# Altium PCB TinyDVR_Master.PcbDoc
Units mil, origin at the board's own origin, x right, y up, seen from the top; angles counter-clockwise.
Board outline 2156 x 1540 mil, 2 copper layers (Top Layer, Bottom Layer); 28 components, 17 nets, 136 pads, 318 vias.
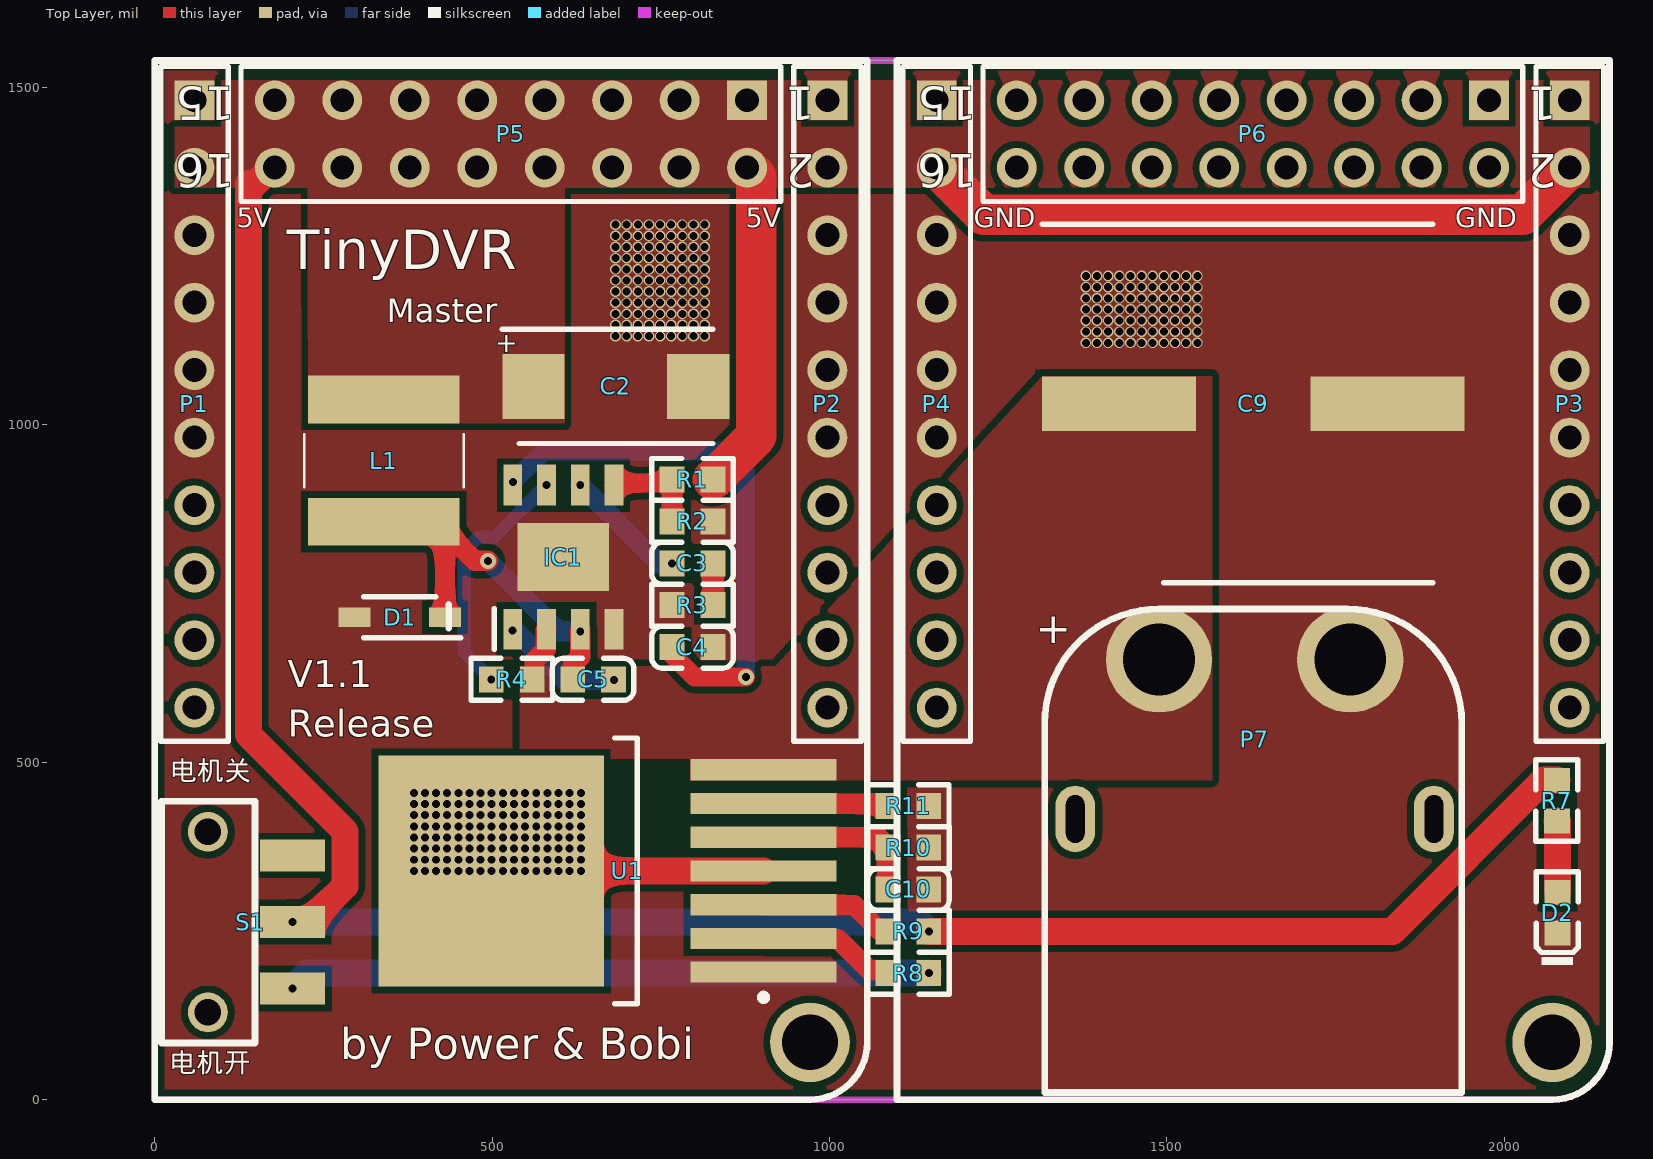
[diagram p0: Top Layer view]
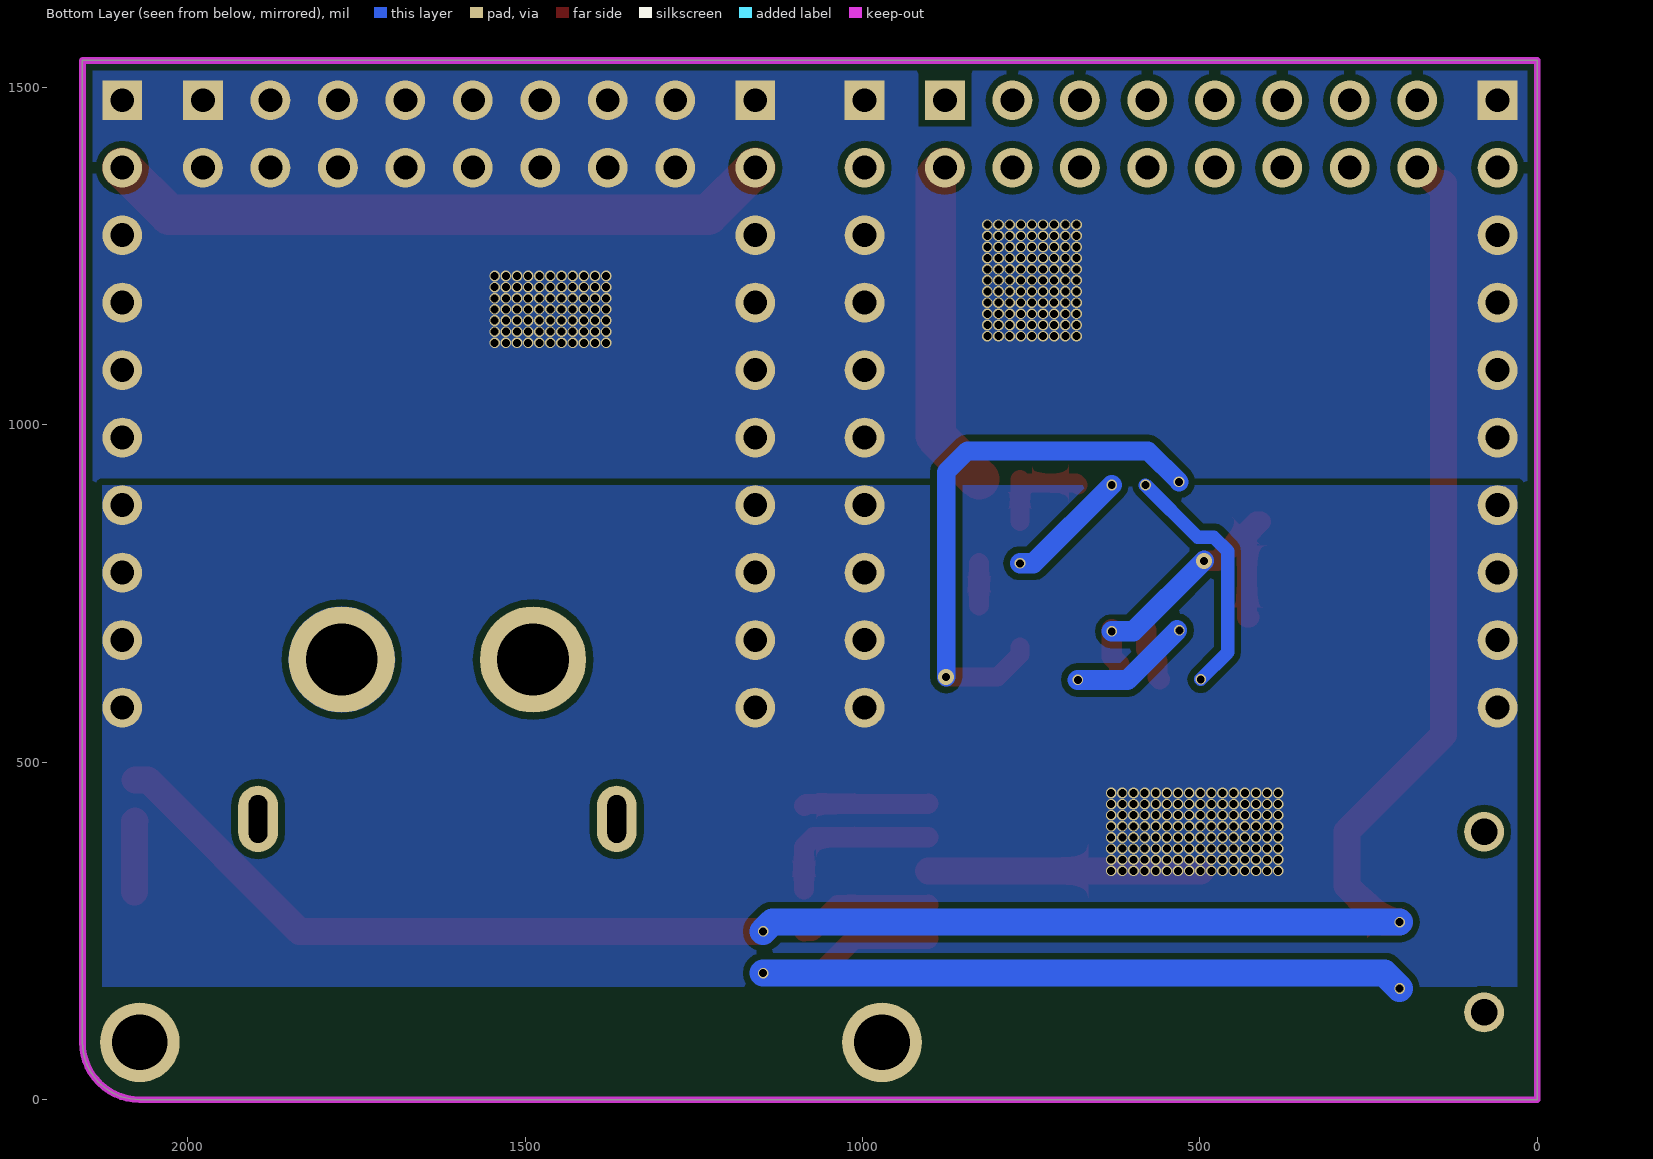
[diagram p1: Bottom Layer view, seen from below]
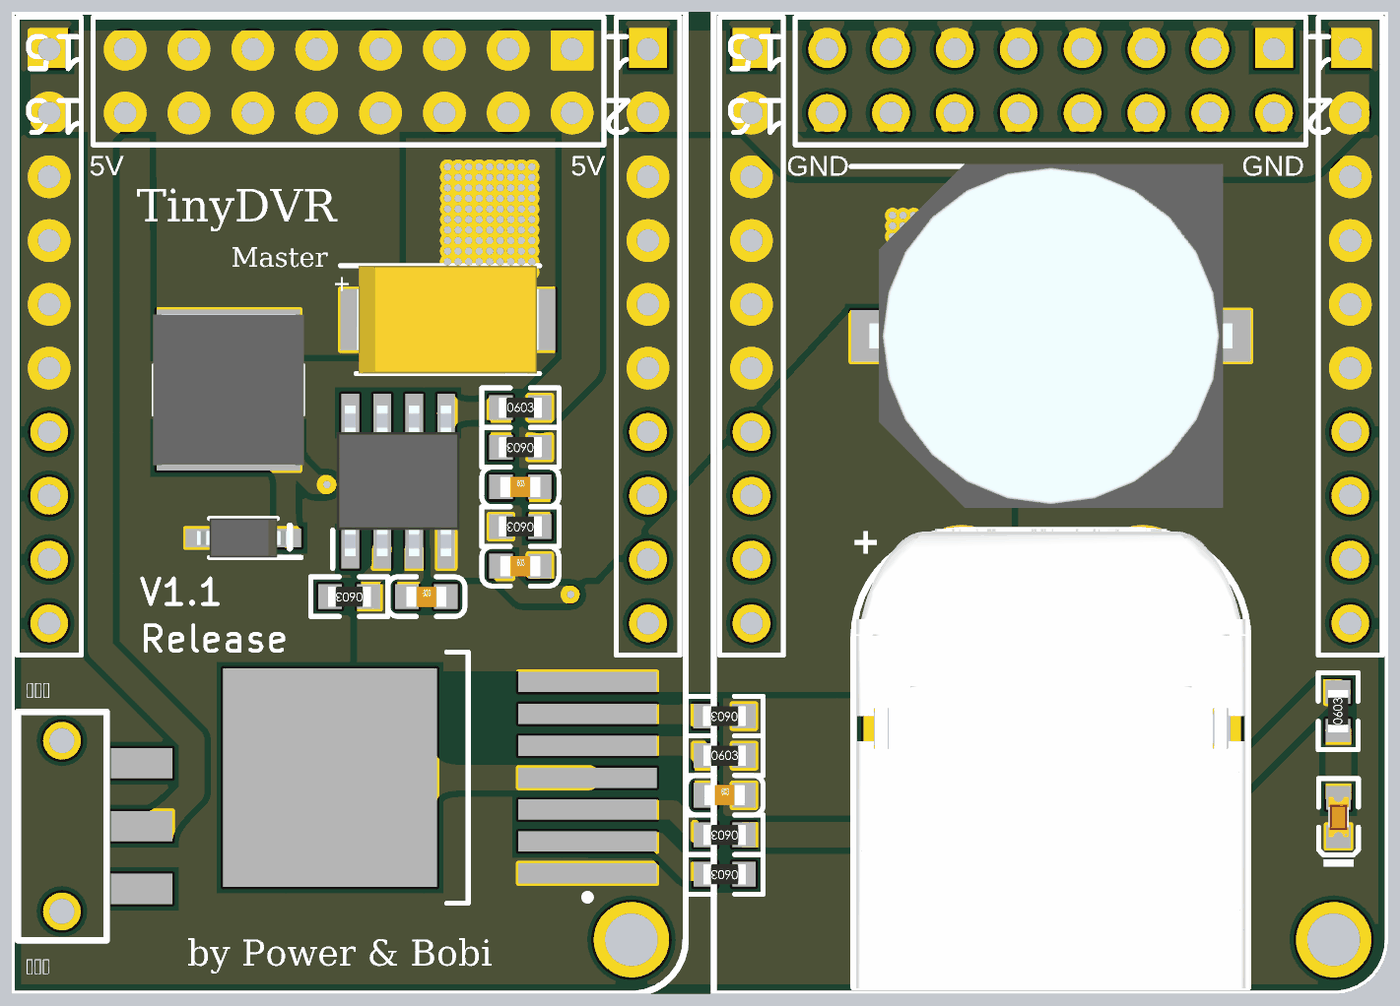
[diagram p2: 3D render of the assembled board from above, using the file's embedded part models]

## Layer stack, top to bottom
Top Solder: solder mask 0.4, Solder Resist, Dk 3.5
Top Layer: signal copper 1.4
Dielectric 1: dielectric 12.6, FR-4, Dk 4.8
Bottom Layer: signal copper 1.4
Bottom Solder: solder mask 0.4, Solder Resist, Dk 3.5

## Board outline
0,0 0,1540 2156,1540 2156,85 cw(c2071,85) 2071,0

## Design rules (kind name [scope] priority, off if disabled: settings)
Clearance [All] p1: gap=10 ignorepadtopadclearanceinfootprint=FALSE except(0: Arc-Hole Track-Hole SMDPad-Hole THPad-Hole Via-Hole Fill-Hole Poly-Hole Region-Hole Text-Hole)
PlaneConnect [All] p1: planeconnectstyle=Direct reliefexpansion=20 reliefentries=4 reliefconductorwidth=10 reliefairgap=10
PolygonConnect [All] p1: connectstyle=Direct reliefconductorwidth=10 reliefentries=4 polygonreliefangle="90 Angle" airgapwidth=10
RoutingVias [All] p1: holewidth=11.81 width=23.62 viastyle="Through Hole" minholewidth=11.81 minwidth=23.62 maxholewidth=11.81 maxwidth=23.62
SolderMaskExpansion [All] p1: expansion=4
Width [All] p1: maxlimit=100 minlimit=10 preferedwidth=10
29 further rules are at their usual default settings.

## Components (designator, comment, footprint, x,y, rotation, side; value= is the part's Value field where it differs from the comment)
C2 "10uF 4.5V tan" CAPPM7343X310N 683.5,1057 r0 top
C3 "6.8nF (682) 10% 50V" 0603_C 797,794.82 r0 top
C4 "100nF (104) 10% 50V" 0603_C 797,670.5 r0 top
C5 "10nF (103) 10% 50V" 0603_C 649.76,622.81 r0 top
C9 "1000uf 25v" CAPAE1350X1400N 1628,1031.5 r0 top
C10 "100nF (104) 10% 50V" 0603_C 1117,311.5 r0 top
D1 "B130LAW-7-F" SOD3716X145N 363.2,714.81 r180 top
D2 "红灯 0603" 0603_LED_S1 2078.5,277.18 r90 top
IC1 "MP1484EN-LF" SOIC127P600X170-9N 605.7,804.04 r90 top
L1 "1040 10UH 5A" 74404064470 339.79,946.84 r270 top
P1 "Header 10" HDR1X10 59,1481 r270 top
P2 "Header 10" HDR1X10 997,1481 r270 top
P3 "Header 10" HDR1X10 2097,1481 r270 top
P4 "Header 10" HDR1X10 1159,1481 r270 top
P5 "Header 8X2" HDR2X8 878,1481 r180 top
P6 "Header 8X2" HDR2X8 1977.5,1481 r180 top
P7 "XT60PW-M" XT60PW-M 1771.7,652.22 r180 top
R1 "44.2K" 0603_R 797,919 r0 top
R2 "10KΩ (1002) ±1%" 0603_R 797,857 r180 top
R3 "6.8KΩ (6801) ±1%" 0603_R 797,732.68 r180 top
R4 "100KΩ (1003) ±1%" 0603_R 529.13,622.81 r180 top
R7 "4.7k" 0603_R 2077.9,443.18 r90 top
R8 "10KΩ (1002) ±1%" 0603_R 1117,187.5 r180 top
R9 "10KΩ (1002) ±1%" 0603_R 1117,249.5 r180 top
R10 "1KΩ (1001) ±1%" 0603_R 1117,373.5 r0 top
R11 "2KΩ (2001) ±1%" 0603_R 1116.69,435.5 r180 top
S1 "SW-SPDT" SW_9*3.5*5.5MM 204,263.14 r90 top
U1 "BTN7971" DPAK127P1615X127-8N 672,339 r180 top

## Footprints (in the part's own frame and the unit in brackets; to place one, negate y for a bottom-side part, rotate by r counter-clockwise, add the part's x,y. Pads: shape width x height; smd on the part's side, far side on the other; paste and mask are expansions set on the pad)
0603_C [mm]
  rect 0.93x0.98 smd: 1(-0.77,0) 2(0.77,0)
  silkscreen extent -1.53,-0.79 1.54,0.79, body extent -0.8,-0.4 0.8,0.4, height 0.3
0603_LED_S1 [mm]
  rect 0.93x0.98 smd: A(0.77,0) K(-0.77,0)
  silkscreen extent -1.98,-0.79 1.54,0.79, body extent -0.8,-0.4 0.8,0.4, height 0.6
0603_R [mm]
  rect 0.93x0.98 smd: 1(-0.77,0) 2(0.77,0)
  silkscreen extent -1.53,-0.79 1.54,0.79, body extent -0.85,-0.4 0.85,0.4, height 0.56
74404064470 [mm]
  rect 1.8x5.7 smd: 1(-2.3,0) 2(2.3,0)
  silkscreen extent -1,-3 1,3, body extent -3.02,-3 3.02,3, height 4.1
CAPAE1350X1400N [mm]
  rect 5.8x2.05 smd: 1(-5.05,0) 2(5.05,0)
  silkscreen extent -7.95,-6.75 6.75,6.75, body extent -7.22,-6.85 7.22,6.85, height 14
CAPPM7343X310N [mm]
  rect 2.35x2.45 smd: 1(-3.1,0) 2(3.1,0)
  silkscreen extent -4.28,-2.15 3.65,2.15, body extent -3.65,-2.15 3.65,2.15, height 3.1
DPAK127P1615X127-8N [mm] "TO, 8-Pads, Body 7.23x8.36mm (max), IPC Medium Density"
  rect 5.5x0.8 smd: 1(-5.85,3.81) 2(-5.85,2.54) 3(-5.85,1.27) 4(-5.85,0) 5(-5.85,-1.27) 6(-5.85,-2.54) 7(-5.85,-3.81)
  rect 8.5x8.7 smd: 8(4.4,0)
  silkscreen extent -5.97,-5 -0.25,5, body extent -1.1,-5 7.15,5, height 1.27
HDR1X10 [mm] "Connector; Header; 10 Position"
  rect 1.5x1.5 hole 0.9: 1(0,0)
  round 1.5 hole 0.9: 2(2.54,0) 3(5.08,0) 4(7.62,0) 5(10.16,0) 6(12.7,0) 7(15.24,0) 8(17.78,0) 9(20.32,0) 10(22.86,0)
  silkscreen extent -1.27,-1.27 24.13,1.27
HDR2X8 [mm] "Connector; Header; 8x2 Position"
  rect 1.5x1.5 hole 0.9: 1(0,0)
  round 1.5 hole 0.9: 2(0,2.54) 3(2.54,0) 4(2.54,2.54) 5(5.08,0) 6(5.08,2.54) 7(7.62,0) 8(7.62,2.54) 9(10.16,0) 10(10.16,2.54) 11(12.7,0) 12(12.7,2.54) 13(15.24,0) 14(15.24,2.54) 15(17.78,0) 16(17.78,2.54)
  silkscreen extent -1.27,-1.27 19.05,3.81
SOD3716X145N [mm]
  rect 1.2x0.75 smd: 1(-1.7,0) 2(1.7,0)
  silkscreen extent -2.3,-0.77 1.35,0.77, body extent -1.85,-0.77 1.85,0.77, height 1.45
SOIC127P600X170-9N [mm]
  rect 1.525x0.7 smd: 1(-2.712,1.905) 2(-2.712,0.635) 3(-2.712,-0.635) 4(-2.712,-1.905) 5(2.712,-1.905) 6(2.712,-0.635) 7(2.712,0.635) 8(2.712,1.905)
  rect 2.56x3.45 smd: 9(0,0)
  silkscreen extent -3.47,2.61 -1.95,2.61, body extent -3,-2.45 3,2.45, height 1.7
SW_9*3.5*5.5MM [mm]
  rect 1.2x2.45 smd: 1(-2.5,0) 2(0,0) 3(2.5,0)
  round 1.5 hole 1: 4(-3.4,3.175) 4(3.4,3.175)
  Top Layer pour cut-out: -1.5,7.9
  silkscreen extent -4.55,1.4 4.55,4.93
XT60PW-M [mm]
  oval 1.5x2.5 hole 0.7 slot 1.8 at 90 deg: 0(-3.15,6) 0(10.35,6)
  round 4 hole 2.7: 1(7.2,0) 2(0,0)
  silkscreen extent -4.2,-1.9 11.5,16.3, body extent -4.3,-1.95 11.6,16.35, height 8.45

## Part data
C2: library part T494D106K035AH, "T494D106K035AH", Manufacturer_Name=Kemet, Mouser Part Number=80-T494D106K035AH, Datasheet Link=http://www.mouser.com/ds/2/212/kemet_kem_t2008_t494-544880.pdf, Height=3.1mm, Manufacturer_Part_Number=T494D106K035AH, Mouser Price/Stock=https://www.mouser.com/Search/Refine.aspx?Keyword=80-T494D106K035AH
C3: library part "0603 6.8nF (682) 10% 50V", "贴片电容", Package=0603, SuppliersPartNumber=C1631, ComponentLink1Description=供?, ComponentLink1URL=http://www.szlcsc.com/product/details_1983.html, Supplier=LC
C4 C10: library part "0603 100nF (104) 10% 50V", "贴片电容", Package=0603, SuppliersPartNumber=C14663, ComponentLink1Description=供?, ComponentLink1URL=http://www.szlcsc.com/product/details_15331.html, Supplier=LC
C5: library part "0603 10nF (103) 10% 50V", "贴片电容", Package=0603, SuppliersPartNumber=C57112, ComponentLink1Description=供?, ComponentLink1URL=http://www.szlcsc.com/product/details_58143.html, Supplier=LC
C9: library part 865060462010, "Capacitor Polarised", Manufacturer_Name="Wurth Elektronik", Mouser Part Number=710-865060462010, RS Part Number=8395599, Datasheet Link=https://katalog.we-online.de/pbs/datasheet/865060462010.pdf, Height=14mm, Manufacturer_Part_Number=865060462010, Mouser Price/Stock=https://www.mouser.com/Search/Refine.aspx?Keyword=710-865060462010, RS Price/Stock=https://uk.rs-online.com/web/p/products/8395599
D1: "Diode", Manufacturer_Name="Diodes Inc.", Mouser Part Number=621-B130LAW-F, RS Part Number=7513193P, Allied_Number=70437536, Allied Price/Stock=http://www.alliedelec.com/diodes-inc-b130law-7-f/70437536/, Datasheet Link=http://docs-emea.rs-online.com/webdocs/104e/0900766b8104e347.pdf, Height=1.45mm, Manufacturer_Part_Number=B130LAW-7-F, Mouser Price/Stock=https://www.mouser.com/Search/Refine.aspx?Keyword=621-B130LAW-F, RS Price/Stock=http://uk.rs-online.com/web/p/products/7513193P
D2: library part "0603 红灯", "发光二极管", Package=0603, SuppliersPartNumber=C2286, ComponentLink1Description=供?, ComponentLink1URL=http://www.szlcsc.com/product/details_2659.html, Supplier=LC
IC1: "Integrated Circuit", Manufacturer_Name="Monolithic Power Systems (MPS)", Mouser Part Number=946-MP1484ENLF, Datasheet Link=http://www.mouser.com/datasheet/2/277/MP1484-1186021.pdf, Height=1.7mm, Manufacturer_Part_Number=MP1484EN-LF, Mouser Price/Stock=https://www.mouser.com/Search/Refine.aspx?Keyword=946-MP1484ENLF
L1: library part 74404064100, "Inductor", Manufacturer_Name="Wurth Elektronik", Mouser Part Number=710-74404064100, RS Part Number=8142663P, Datasheet Link=https://katalog.we-online.com/pbs/datasheet/74404064100.pdf, Height=4mm, Manufacturer_Part_Number=74404064100, Mouser Price/Stock=https://www.mouser.com/Search/Refine.aspx?Keyword=710-74404064100, RS Price/Stock=http://uk.rs-online.com/web/p/products/8142663P
P1 P2 P3 P4: "Header, 10-Pin", LatestRevisionDate=17-Jul-2002, LatestRevisionNote="Re-released for DXP Platform.", Publisher="Altium Limited"
P5 P6: "Header, 8-Pin, Dual row", LatestRevisionDate=17-Jul-2002, LatestRevisionNote="Re-released for DXP Platform.", Publisher="Altium Limited"
P7: library part XT60, "XT60"
R1: library part "0603 1.5KΩ (1501) 1%", "贴片电阻", Package=0603, SuppliersPartNumber=C22843, ComponentLink1Description=供?, ComponentLink1URL=http://www.szlcsc.com/product/details_23570.html, Supplier=LC
R2 R8 R9: library part "0603 10KΩ (1002) 1%", "贴片电阻", Package=0603, SuppliersPartNumber=C25804, ComponentLink1Description=供?, ComponentLink1URL=http://www.szlcsc.com/product/details_26547.html, Supplier=LC
R3: library part "0603 6.8KΩ (6801) 1%", "贴片电阻", Package=0603, SuppliersPartNumber=C23212, ComponentLink1Description=供?, ComponentLink1URL=http://www.szlcsc.com/product/details_23939.html, Supplier=LC
R4: library part "0603 100KΩ (1003) 1%", "贴片电阻", Package=0603, SuppliersPartNumber=C25803, ComponentLink1Description=供?, ComponentLink1URL=http://www.szlcsc.com/product/details_26546.html, Supplier=LC
R7: library part "0603 470Ω (4700) 1%", "贴片电阻", Package=0603, SuppliersPartNumber=C23179, ComponentLink1Description=供?, ComponentLink1URL=http://www.szlcsc.com/product/details_23906.html, Supplier=LC
R10: library part "0603 1KΩ (1001) 1%", "贴片电阻", Package=0603, SuppliersPartNumber=C21190, ComponentLink1Description=供?, ComponentLink1URL=http://www.szlcsc.com/product/details_21904.html, Supplier=LC
R11: library part "0603 2KΩ (2001) 1%", "贴片电阻", Package=0603, SuppliersPartNumber=C22975, ComponentLink1Description=供?, ComponentLink1URL=http://www.szlcsc.com/product/details_23702.html, Supplier=LC
S1: "SPDT Subminiature Toggle Switch, Right Angle Mounting, Vertical Actuation", ComponentLink1Description="Manufacturer Link", ComponentLink1URL=http://www.apem.com, DatasheetVersion=05-Dec-2000, LatestRevisionDate=17-Dec-2003, LatestRevisionNote="Schematic revised, PCB Footprint replaced.", PackageDescription="Switch; 4 Leads", PackageReference=TL36WW15050, Published=24-Mar-1999, Publisher="Altium Limited"

## Free pads (board coordinates)
  round 118.11 hole 82.68: 6(971,85) 6(2071,85)

## Via types
v1: diameter 15.75, hole 11.81, Top Layer to Bottom Layer, 316 vias
v2: diameter 23.62, hole 11.81, Top Layer to Bottom Layer, 2 vias

## Nets (pads, with @x,y where several pads share a name; then routed paths per layer and width w, separated by ;. In a path a pad name is that pad's centre, name@x,y a point inside that pad or via, vN(x,y) a via of type N, cw(c..) or ccw(c..) an arc to the next point about the centre after c; other vN are vias at no path point)
5VOUT: C2.1 L1.1 P1.2 P2.2 P3.2 P4.2 P5.1 P5.2 P5.3 P5.4 P5.5 P5.6 P5.7 P5.8 P5.9 P5.10 P5.11 P5.12 P5.13 P5.14 P5.15 P5.16 R1.2 R7.2 R9.1 S1.2 | length 4711.6
  Top Layer w40: P5.16 172.84,1381 149.41,1357.57 139,1357.57 139,540.84 282.23,397.62 282.23,316.76 228.61,263.14 v1(204,263.14) ; v1(1147.32,249.5) 1834.5,249.5 2058.5,473.5 R7.2
  Top Layer w60: R1.2 891.81,983.49 891.81,1367.19 P5.2 ; P4.2 1228.53,1311.47 2027.47,1311.47 P3.2
  Bottom Layer w40: v1(204,263.14) 1133.67,263.14 v1(1147.32,249.5)
GND: C2.2 C4.2 C9.2 C10.2 D1.2 D2.K IC1.4 IC1.9 P1.1 P1.3 P1.4 P1.5 P1.6 P2.1 P2.3 P2.4 P2.5 P2.6 P3.1 P3.3 P3.4 P3.5 P3.6 P4.1 P4.3 P4.4 P4.5 P4.6 P6.1 P6.2 P6.3 P6.4 P6.5 P6.6 P6.7 P6.8 P6.9 P6.10 P6.11 P6.12 P6.13 P6.14 P6.15 P6.16 P7.2 R2.1 R3.2 R10.2 R11.1 U1.1
  other v1: 1380,1121.5 1396.5,1121.5 1413,1121.5 1429.5,1121.5 1446,1121.5 1462.5,1121.5 1479,1121.5 1495.5,1121.5 1512,1121.5 1528.5,1121.5 1545,1121.5 683,1131.5 699.5,1131.5 716,1131.5 732.5,1131.5 749,1131.5 765.5,1131.5 782,1131.5 798.5,1131.5 815,1131.5 1380,1138 1396.5,1138 1413,1138 1429.5,1138 1446,1138 1462.5,1138 1479,1138 1495.5,1138 1512,1138 1528.5,1138 1545,1138 683,1148 699.5,1148 716,1148 732.5,1148 749,1148 765.5,1148 782,1148 798.5,1148 815,1148 1380,1154.5 1396.5,1154.5 1413,1154.5 1429.5,1154.5 1446,1154.5 1462.5,1154.5 1479,1154.5 1495.5,1154.5 1512,1154.5 1528.5,1154.5 1545,1154.5 683,1164.5 699.5,1164.5 716,1164.5 732.5,1164.5 749,1164.5 765.5,1164.5 782,1164.5 798.5,1164.5 815,1164.5 1380,1171 1396.5,1171 1413,1171 1429.5,1171 1446,1171 1462.5,1171 1479,1171 1495.5,1171 1512,1171 1528.5,1171 1545,1171 683,1181 699.5,1181 716,1181 732.5,1181 749,1181 765.5,1181 782,1181 798.5,1181 815,1181 1380,1187.5 1396.5,1187.5 1413,1187.5 1429.5,1187.5 1446,1187.5 1462.5,1187.5 1479,1187.5 1495.5,1187.5 1512,1187.5 1528.5,1187.5 1545,1187.5 683,1197.5 699.5,1197.5 716,1197.5 732.5,1197.5 749,1197.5 765.5,1197.5 782,1197.5 798.5,1197.5 815,1197.5 1380,1204 1396.5,1204 1413,1204 1429.5,1204 1446,1204 1462.5,1204 1479,1204 1495.5,1204 1512,1204 1528.5,1204 1545,1204 683,1214 699.5,1214 716,1214 732.5,1214 749,1214 765.5,1214 782,1214 798.5,1214 815,1214 1380,1220.5 1396.5,1220.5 1413,1220.5 1429.5,1220.5 1446,1220.5 1462.5,1220.5 1479,1220.5 1495.5,1220.5 1512,1220.5 1528.5,1220.5 1545,1220.5 683,1230.5 699.5,1230.5 716,1230.5 732.5,1230.5 749,1230.5 765.5,1230.5 782,1230.5 798.5,1230.5 815,1230.5 683,1247 699.5,1247 716,1247 732.5,1247 749,1247 765.5,1247 782,1247 798.5,1247 815,1247 683,1263.5 699.5,1263.5 716,1263.5 732.5,1263.5 749,1263.5 765.5,1263.5 782,1263.5 798.5,1263.5 815,1263.5 683,1280 699.5,1280 716,1280 732.5,1280 749,1280 765.5,1280 782,1280 798.5,1280 815,1280 683,1296.5 699.5,1296.5 716,1296.5 732.5,1296.5 749,1296.5 765.5,1296.5 782,1296.5 798.5,1296.5 815,1296.5
NetC3_1: C3.1 IC1.6 | length 184
  Bottom Layer w30: v1(630.7,910.81) 746.7,794.82 v1(766.69,794.82)
NetC3_2: C3.2 R3.1 | length 62.1
  Top Layer w30: R3.1 C3.2
NetC4_1: C4.1 IC1.8 | length 815.2
  Top Layer w28: C4.1 766.69,659.59 800.15,626.12 v2(876,626.12)
  Bottom Layer w28: v1(531,915.5) 577,961.5 844.73,961.5 876,930.23 v2(876,626.12)
NetC5_1: C5.1 D1.1 IC1.3 L1.2 | length 521.2
  Top Layer w30: D1.1@426.42,715.05 426.65,714.81 429.89,714.81 D1.1@430.13,714.58 ; D1.1 430.13,835.85 409.7,856.29 416.56,856.29 474.34,798.5 v2(494,798.5) ; C5.1 619.45,645.06 630.7,656.31 v1(630.7,694) IC1.3
  Bottom Layer w30: v2(494,798.5) 598.5,694 v1(630.7,694)
NetC5_2: C5.2 IC1.1 | length 177.6
  Bottom Layer w30: v1@533.82,695.5 607.32,622 v1(681,622)
  other v1: 530.5,695.5
NetC10_1: C10.1 R10.1 U1.5 | length 253.4
  Top Layer w30: U1.5 1072.17,389 1086.69,374.48 R10.1 C10.1
NetD2_A: D2.A R7.1 | length 105.6
  Top Layer w40: R7.1 2078.5,412.27 D2.A
NetIC1_5: IC1.5 R1.1 R2.2 | length 151
  Top Layer w28: IC1.5 683.59,913.71 762.38,913.71 R1.1@766.69,918.02 ; R2.2 R1.1@766.69,918.02 ; R1.1 R1.1@766.69,918.02
NetIC1_7: IC1.7 R4.2 | length 368.9
  Bottom Layer w20: v1(498.82,622.81) 459,662.63 459,813 479.5,833.5 503.39,833.5 v1(580.7,910.81)
NetR8_1: R8.1 S1.1 | length 952.8
  Bottom Layer w40: v1(204,164.72) 226.78,187.5 v1(1147.32,187.5)
NetR8_2: R8.2 U1.2 | length 206.3
  Top Layer w30: U1.2 903.06,238.25 1012.43,238.25 1058.89,191.79 1083.38,191.79 1086.69,188.48 R8.2
NetR9_2: R9.2 U1.3 | length 201.3
  Top Layer w30: U1.3 903.06,288.25 1036.98,288.25 1074.75,250.48 1086.69,250.48 R9.2
NetR11_2: R11.2 U1.6 | length 185.5
  Top Layer w30: U1.6 903.06,438.25 1083.62,438.25 R11.2
VCC: P1.7 P1.8 P1.9 P1.10 P2.7 P2.8 P2.9 P2.10 P3.7 P3.8 P3.9 P3.10 P4.7 P4.8 P4.9 P4.10 U1.4 U1.8 | length 403.5
  Top Layer w40: U1.8 U1.4
  other v1: 384,339 400.5,339 417,339 433.5,339 450,339 466.5,339 483,339 499.5,339 516,339 532.5,339 549,339 565.5,339 582,339 598.5,339 615,339 631.5,339 384,355.5 400.5,355.5 417,355.5 433.5,355.5 450,355.5 466.5,355.5 483,355.5 499.5,355.5 516,355.5 532.5,355.5 549,355.5 565.5,355.5 582,355.5 598.5,355.5 615,355.5 631.5,355.5 384,372 400.5,372 417,372 433.5,372 450,372 466.5,372 483,372 499.5,372 516,372 532.5,372 549,372 565.5,372 582,372 598.5,372 615,372 631.5,372 384,388.5 400.5,388.5 417,388.5 433.5,388.5 450,388.5 466.5,388.5 483,388.5 499.5,388.5 516,388.5 532.5,388.5 549,388.5 565.5,388.5 582,388.5 598.5,388.5 615,388.5 631.5,388.5 384,405 400.5,405 417,405 433.5,405 450,405 466.5,405 483,405 499.5,405 516,405 532.5,405 549,405 565.5,405 582,405 598.5,405 615,405 631.5,405 384,421.5 400.5,421.5 417,421.5 433.5,421.5 450,421.5 466.5,421.5 483,421.5 499.5,421.5 516,421.5 532.5,421.5 549,421.5 565.5,421.5 582,421.5 598.5,421.5 615,421.5 631.5,421.5 384,438 400.5,438 417,438 433.5,438 450,438 466.5,438 483,438 499.5,438 516,438 532.5,438 549,438 565.5,438 582,438 598.5,438 615,438 631.5,438 384,454.5 400.5,454.5 417,454.5 433.5,454.5 450,454.5 466.5,454.5 483,454.5 499.5,454.5 516,454.5 532.5,454.5 549,454.5 565.5,454.5 582,454.5 598.5,454.5 615,454.5 631.5,454.5
VCCIN: C9.1 IC1.2 P7.1 R4.1 U1.7 | length 83.3
  Top Layer w30: R4.1 562.76,626.12 562.76,650.17 579.48,666.9 579.48,696.05 IC1.2
pads on no net: P7.0 S1.3 S1.4

## Polygon pours and split planes (outlines as drawn)
GND on Top Layer "GND_L01_P021" (solid, remove dead copper, pour order 21): -155,1937 2603,1937 2603,-491 -149.5,-491 -149.5,1938.5
VCCIN on Top Layer "VCCIN_L01_P015" (solid, remove dead copper, pour order 15): 541,642 541,505.5 1030.5,505.5 1030.5,642
5VOUT on Top Layer "5VOUT_L01_P013" (solid, remove dead copper, pour order 13): 227.5,1002 607.5,1002 607.5,1509 226.5,1509
VCCIN on Top Layer "VCCIN_L01_P011" (solid, remove dead copper, pour order 11): 1315,1072 1567,1072 1567,473.5 794,473.5 794,505
5VOUT on Top Layer "5VOUT_L01_P009" (solid, remove dead copper, pour order 9): 2126.5,1510.5 2126.5,1351.5 29.5,1351.5 29.5,1510.5
GND on Bottom Layer "GND_L02_P023" (solid, remove dead copper, pour order 23): -184,1953 2610,1953 2610,-500 -158,-500 -158,1937.5
VCC on Bottom Layer "VCC_L02_P017" (solid, remove dead copper, pour order 17): 29.5,910.5 2126.5,910.5 2126.5,167.5 29.5,167.5

## Keep-outs
Keep-Out Layer:
  the board outline again, w10

## Silkscreen, mask and mechanical layers (free items; w line width, h text height)
Top Overlay:
  lines w10: 436,698.5 436,734 ; 0,0 971,0 ccw(c971,85) 1056,85 1056,1540 0,1540 0,0 ; 1100,0 1100,1540 2156,1540 2156,85 cw(c2071,85) 2071,0 1100,0
  text "5V" at 122,1283.28 h50
  text "5V" at 876,1283.28 h50
  text "GND" at 1214,1283 h50
  text "GND" at 1927,1283 h50
  text "TinyDVR" at 195.75,1211 h100
  text "Master" at 344,1140 h60
  text "+" at 504.5,1098 h50
  text "V1.1" at 197,611 h40
  text "Release" at 197,537.5 h40
  text "电机关" at 23,464 h50
  text "by Power & Bobi" at 275,44.5 h80
  text "电机开" at 22.69,31 h50

## Text inside footprints (layer, text, board x,y; h text height)
P5: Top Overlay "2" at 978,1401 h50 r180; Top Overlay "1" at 978,1501 h50 r180; Top Overlay "15" at 118,1501 h50 r180; Top Overlay "16" at 118,1401 h50 r180
P6: Top Overlay "2" at 2077.5,1401 h50 r180; Top Overlay "1" at 2077.5,1501 h50 r180; Top Overlay "15" at 1217.5,1501 h50 r180; Top Overlay "16" at 1217.5,1401 h50 r180
P7: Top Overlay "+" at 1358.31,730.96 h78.74 r180